# Altium PCB Motherboard.PcbDoc (part 2 of 2)
Units mil, origin at the board's own origin, x right, y up, seen from the top; angles counter-clockwise.
Board outline 12000 x 6000 mil, 2 copper layers (Top Layer, Bottom Layer); 292 components, 245 nets, 1024 pads, 7 vias.
Unrouted connection lines stored in the file: 549.
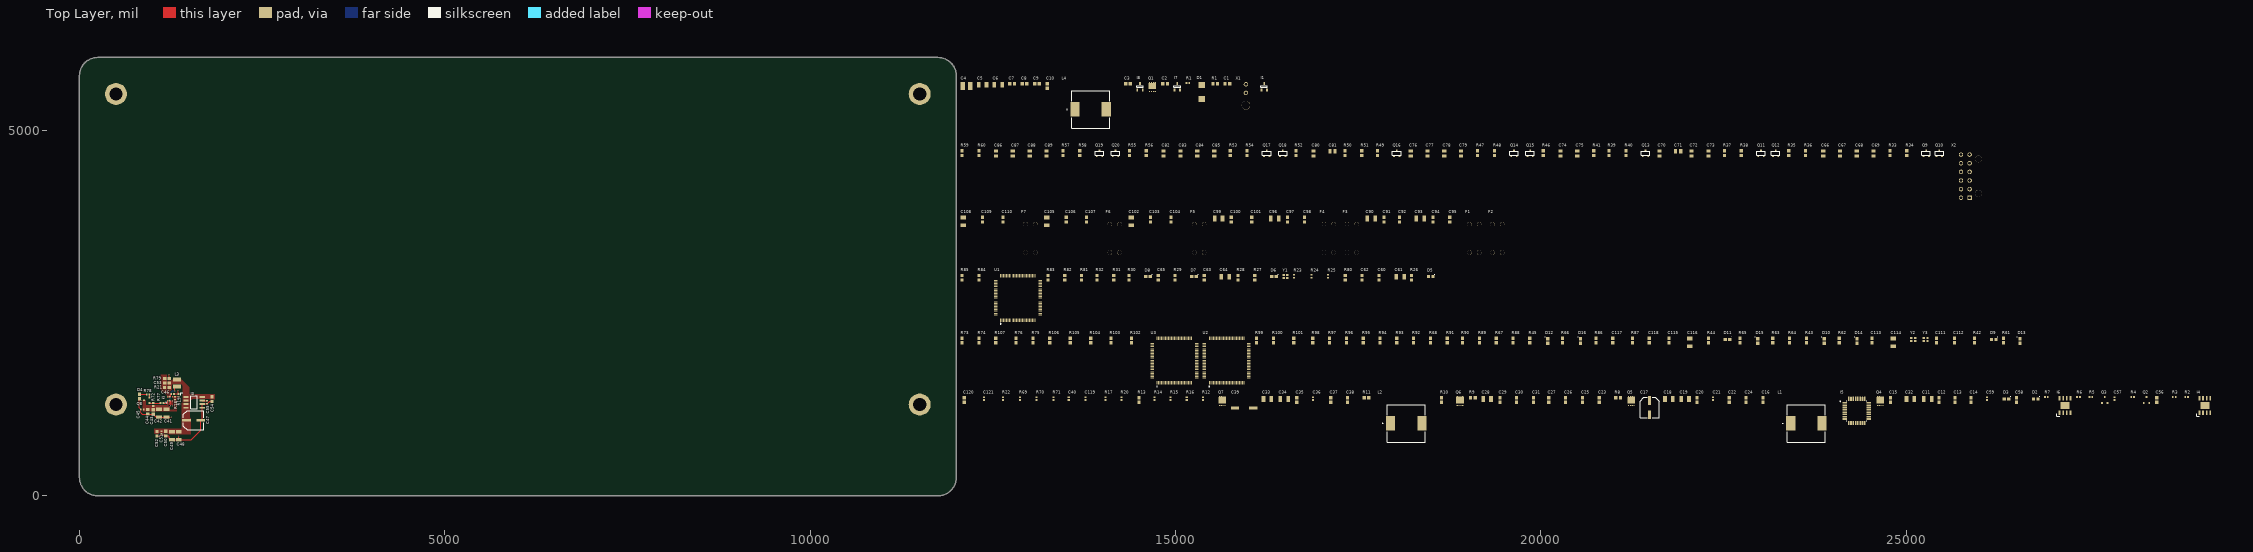
[diagram p0: Top Layer view]

## Via types
v1: diameter 20, hole 10, Top Layer to Bottom Layer, 7 vias

## Nets (pads, with @x,y where several pads share a name; then routed paths per layer and width w, separated by ;. In a path a pad name is that pad's centre, name@x,y a point inside that pad or via, vN(x,y) a via of type N, cw(c..) or ccw(c..) an arc to the next point about the centre after c; other vN are vias at no path point) (continued)
pads on no net: I4.5 I4.7 I4.9 I6.5 I6.7 I6.9 R33.2 R34.2 R35.2 R36.2 R37.2 R38.2 R39.2 R40.2 R41.2 R46.2 R47.2 R48.2 R49.2 R50.2 R51.2 R52.2 R53.2 R54.2 R55.2 R56.2 R57.2 R58.2 R59.2 R60.2 U1.1 U1.2 U1.3 U1.4 U1.5 U1.7 U1.8 U1.9 U1.14 U1.15 U1.16 U1.17 U1.18 U1.34 U1.35 U1.36 U1.37 U1.38 U1.39 U1.41 U1.43 U1.45 U1.46 U1.47 U1.48 U1.63 U1.64 U1.65 U1.66 U1.67 U1.70 U1.71 U1.73 U1.77 U1.78 U1.79 U1.80 U1.81 U1.82 U1.83 U1.84 U1.85 U1.86 U1.89 U1.94 U1.95 U1.96 U1.97 U1.98 U2.1 U2.2 U2.3 U2.4 U2.5 U2.7 U2.8 U2.9 U2.14 U2.15 U2.16 U2.17 U2.18 U2.39 U2.41 U2.43 U2.44 U2.45 U2.46 U2.71 U2.73 U2.77 U2.78 U2.79 U2.80 U2.81 U2.82 U2.83 U2.84 U2.85 U2.86 U2.91 U2.94 U2.97 U2.98 U3.1 U3.2 U3.3 U3.4 U3.5 U3.7 U3.8 U3.9 U3.14 U3.15 U3.16 U3.17 U3.18 U3.39 U3.41 U3.43 U3.44 U3.45 U3.46 U3.71 U3.73 U3.77 U3.78 U3.79 U3.80 U3.81 U3.82 U3.83 U3.84 U3.85 U3.86 U3.91 U3.94 U3.97 U3.98 X1.1 X2.1

## Polygon pours and split planes (outlines as drawn)
5V_Main on Top Layer "5V_MAIN_L01_P000" (solid, pour order 0): 1235,1180 1290,1180 1290,1335 1335,1335 1335,1225 1333.75,1226.25 1335,1155 1270,1155 865,1155 865,1305 905,1305 905,1240.52 1200,1245 1220,1315 1235,1315
FB_3.3V on Top Layer "FB_3.3V_L01_P003" (solid, pour order 3): 1215,1340 1215,1420 1195,1440 1195,1655 1115,1655 1115,1455 1200,1370 1200,1340
OUT_3.3V on Top Layer "OUT_3.3V_L01_P004" (solid, pour order 4): 1505,1285 1550,1330 1775,1330 1780,1325 1850,1325 1850,1390 1515,1390 1505,1400 1505,1485 1400,1590 1270,1590 1255,1575 1200,1575 1200,1455 1225,1430 1225,1340 1235,1340 1235,1425 1260,1450 1260,1520 1400,1520 1415,1505 1415,1285
3.3V_Main on Top Layer "3.3V_MAIN_L01_P005" (solid, pour order 5): 1204.55,855.45 1204.09,855 1150,855 1140,865 1100,865 1085,850 1025,850 1025,915 1400,915 1400,1275 1510,1275 1510,1075 1525,1060 1525,840 1220,840
GND on Bottom Layer "GND_L02_P006" (solid, pour order 6): 770,1685 1860,1685 1860,610 1855,615 770,615

## Silkscreen, mask and mechanical layers (free items; w line width, h text height)
Mechanical 1:
  the board outline again, w10